# EAGLE board power-transistors (EAGLE 4.16)
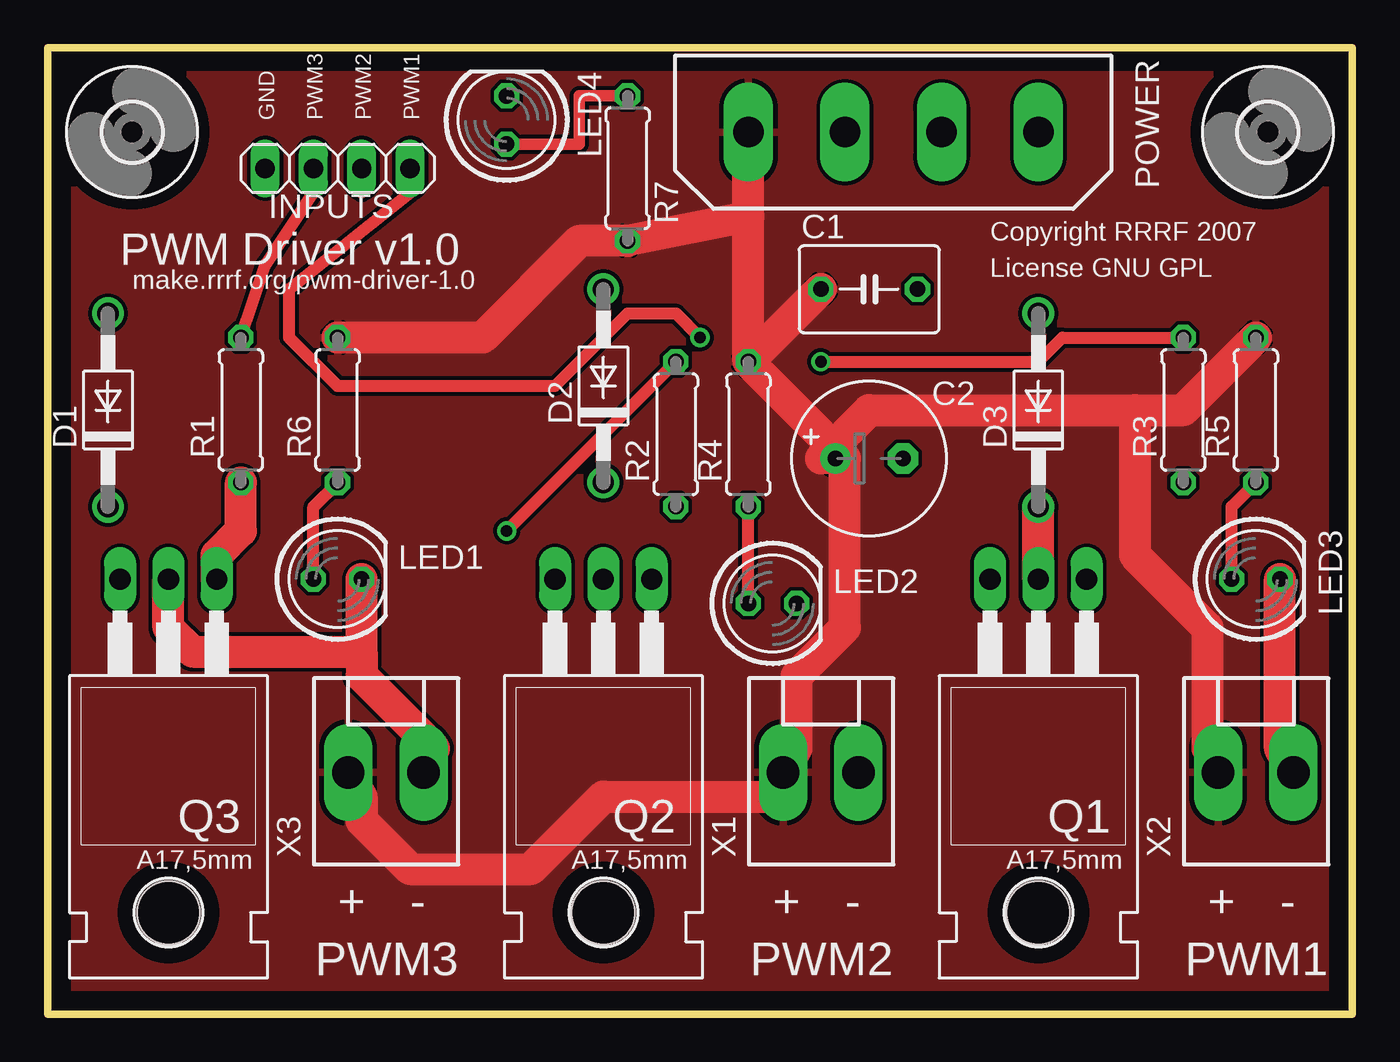
[diagram p0: board, top side]
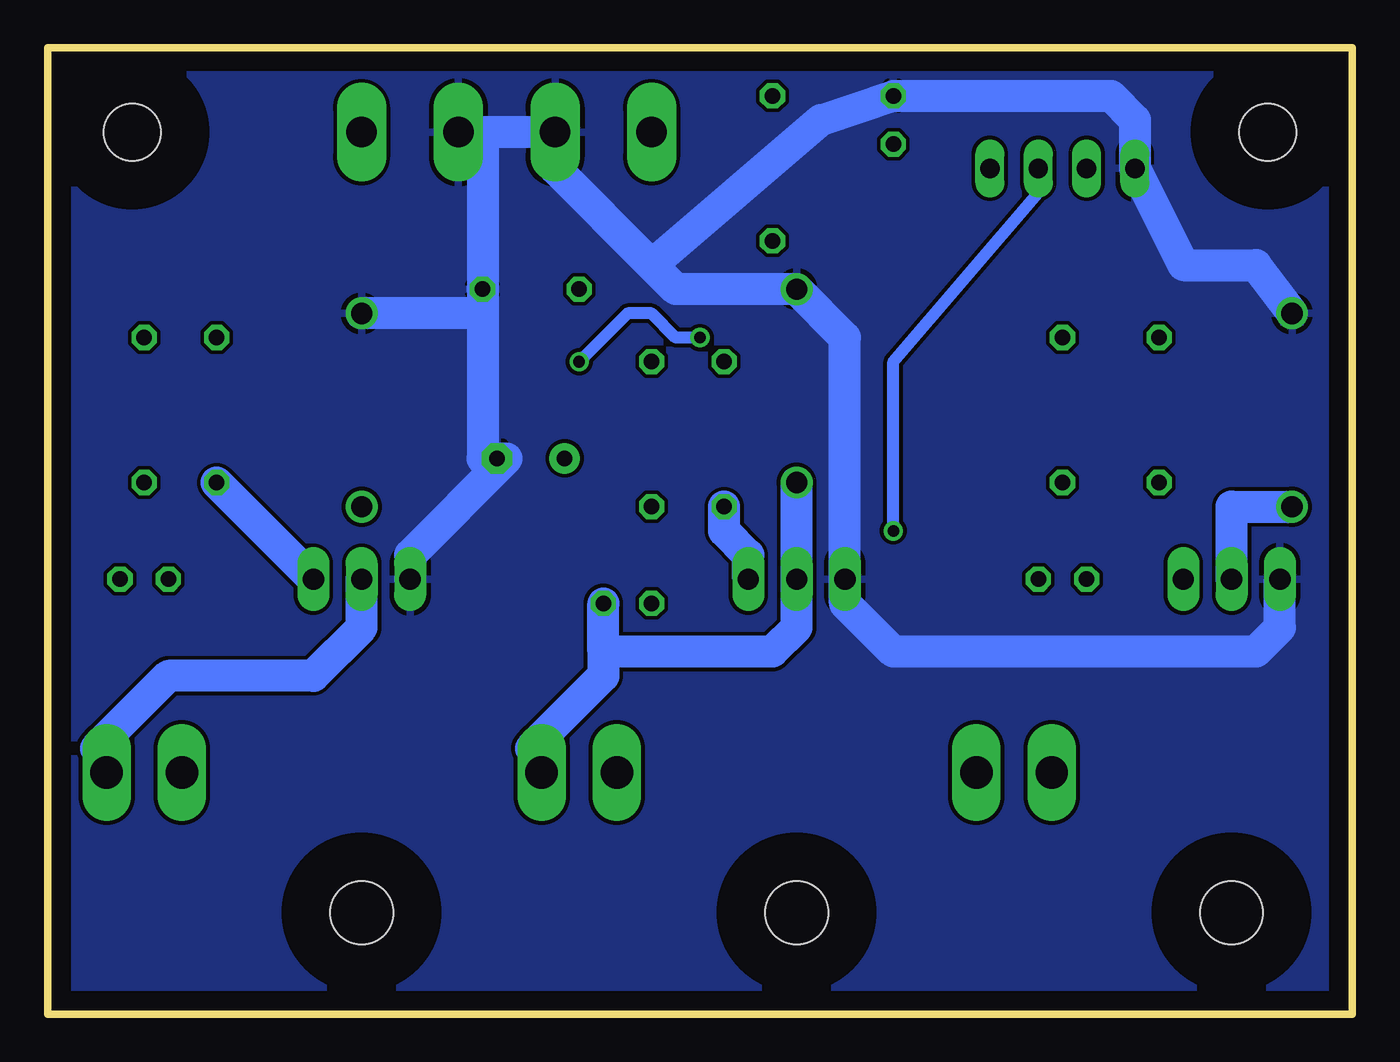
[diagram p1: board, bottom side, seen from below]

Size 68.58 x 50.8 mm. Coordinates in mm from the lower left corner, seen from the top.
Outline: 68.58,0 68.58,50.8 0,50.8 0,0 68.58,0
Copper layers (1*16): Top 0.035mm / dielectric 1.5mm / Bottom 0.035mm
Design rules "default": minimum track width 10mil, minimum drill 24mil, track to track 8mil, track to pad 8mil, pad to pad 8mil, via to via 8mil, smd to smd 8mil, copper to edge 40mil, drill to drill 8mil, minimum pad ring 10mil, minimum via ring 8mil, stop-mask expansion 4mil, vias tented up to drill 0mil, thermal gap 10mil
Net classes: 0 default: width 1.676 mm, drill 0.508 mm; 1 signal: width 0.635 mm, drill 0.381 mm

## Footprints (pad centres in the part's own frame; a part is rotated, then mirrored left to right if it is on the bottom)
C050-045X075 = drill 0.813 octagon: 1 -2.54,0; 2 2.54,0
E3,5-8 = drill 0.813 pad 1.6 round: + -1.778,0 | drill 0.813 pad 1.6 octagon: - 1.778,0
DO41-10 = drill 1.118 round: A 5.08,0; C -5.08,0
3,0 = hole 3: 0,0
1X04 = drill 1.016 long: 1 -3.81,0; 2 -1.27,0; 3 1.27,0; 4 3.81,0
LED5MM = drill 0.813 octagon: A -1.27,0; K 1.27,0
9090-4V = drill 1.6 pad 2.6 long: 1 -7.62,0; 2 -2.54,0; 3 2.54,0; 4 7.62,0
TO220AH = drill 1.118 long: B -2.54,-6.35; C 0,-6.35; E 2.54,-6.35 | hole 3.302: 0,11.176
0207/7 = drill 0.813 octagon: 1 -3.81,0; 2 3.81,0
KK-156-2 = drill 1.7 pad 2.184 long: 1 -1.98,0; 2 1.98,0

## Placement (x,y rotation side)
C1  100nF  [C050-045X075]  43.18,38.1 0 top
C2  100uF  [E3,5-8]  43.18,29.21 0 top
D1  1N4004  [DO41-10]  3.17,31.75 90 top
D2  1N4004  [DO41-10]  29.21,33.02 90 top
D3  1N4004  [DO41-10]  52.07,31.75 90 top
H1  MOUNT-HOLE3.0  [3,0]  64.14,46.36 0 top
H2  MOUNT-HOLE3.0  [3,0]  4.44,46.36 0 top
INPUTS  [1X04]  15.24,44.45 0 top
LED1  [LED5MM]  15.24,22.86 0 top
LED2  [LED5MM]  38.1,21.59 0 top
LED3  [LED5MM]  63.5,22.86 0 top
LED4  [LED5MM]  24.13,46.99 90 top
POWER  9090-4V  [9090-4V]  44.45,46.36 180 top
Q1  TIP120  [TO220AH]  52.07,16.51 180 top
Q2  TIP120  [TO220AH]  29.21,16.51 180 top
Q3  TIP120  [TO220AH]  6.35,16.51 180 top
R1  1K  [0207/7]  10.16,31.75 90 top
R2  1K  [0207/7]  33.02,30.48 90 top
R3  1K  [0207/7]  59.69,31.75 90 top
R4  560  [0207/7]  36.83,30.48 90 top
R5  560  [0207/7]  63.5,31.75 90 top
R6  560  [0207/7]  15.24,31.75 90 top
R7  560  [0207/7]  30.48,44.45 270 top
X1  [KK-156-2]  40.64,12.7 0 top
X2  [KK-156-2]  63.5,12.7 0 top
X3  [KK-156-2]  17.78,12.7 0 top

## Library data of the parts
C1 C2 R1-R7 = rcl
D1-D3 = diode
H1 H2 = holes
INPUTS = pinhead
LED1-LED4 = led
POWER = con-thomas-betts
Q1-Q3 = transistor-power
X1-X3 = con-molex

## Nets
GND: C1.2 C2.- D1.A D2.A D3.A INPUTS.1 LED4.K POWER.2 POWER.3 Q1.E Q2.E Q3.E
N$1: D1.C LED1.K Q3.C X3.2
N$2: D2.C LED2.K Q2.C X1.2
N$3: D3.C LED3.K Q1.C X2.2
N$4 [signal]: LED3.A R5.1
N$5 [signal]: LED2.A R4.1
N$6: Q2.B R2.1
N$7: Q1.B R3.1
N$8: Q3.B R1.1
N$9 [signal]: LED1.A R6.1
N$10 [signal]: LED4.A R7.1
PWM_1 [signal]: INPUTS.2 R1.2
PWM_2 [signal]: INPUTS.3 R2.2
PWM_3 [signal]: INPUTS.4 R3.2
VSS: C1.1 C2.+ POWER.4 R4.2 R5.2 R6.2 R7.2 X1.1 X2.1 X3.1

## Tracks (layer width: path | path; a pad name or v marks a point on that pad's centre or on a via)
GND
  Bottom 1.676: D1.A 5.08,39.37 8.89,39.37 INPUTS.1 11.43,46.99 12.7,48.26 LED4.K 27.94,46.99 36.83,39.37 | Q3.E 3.81,20.32 5.08,19.05 24.13,19.05 26.67,21.59 Q2.E 26.67,35.56 D2.A 35.56,38.1 36.83,39.37 | 36.83,39.37 41.91,44.45 POWER.3 POWER.2 45.72,45.72 C1.2 45.72,36.83 | 45.72,36.83 45.72,29.21 C2.- 44.45,29.21 49.53,24.13 Q1.E | 45.72,36.83 D3.A
  pour Bottom: 0.63,50.17 67.95,50.17 67.95,0.63 0.63,0.63
N$1
  Top 1.676: 16.51,19.05 16.51,17.78 20.32,13.97 X3.2 | 16.51,19.05 LED1.K | 16.51,19.05 7.62,19.05 6.35,20.32 Q3.C
  Bottom 1.676: D1.C 6.35,26.67 Q3.C
N$2
  Bottom 1.676: D2.C Q2.C 29.21,20.32 30.48,19.05 39.37,19.05 | 39.37,19.05 39.37,17.78 43.18,13.97 X1.2 | 39.37,19.05 LED2.K
N$3
  Top 1.676: Q1.C D3.C | LED3.K 64.77,13.97 X2.2
  Bottom 1.676: Q1.C 52.07,20.32 54.61,17.78 62.23,17.78 66.04,13.97 X2.2
N$4
  Top 0.635: LED3.A 62.23,26.67 R5.1
N$5
  Top 0.635: LED2.A R4.1
N$6
  Bottom 1.676: R2.1 33.02,25.4 31.75,24.13 Q2.B
N$7
  Bottom 1.676: Q1.B R3.1
N$8
  Top 1.676: R1.1 10.16,25.4 8.89,24.13 Q3.B
N$9
  Top 0.635: LED1.A 13.97,26.67 R6.1
N$10
  Top 0.61: LED4.A 27.94,45.72 27.94,48.26 R7.1
PWM_1
  Top 0.635: R1.2 11.43,39.37 13.97,43.18 INPUTS.2
PWM_2  (via drill 0.61)
  Top 0.635: INPUTS.3 16.51,43.18 | v24.13,25.4 R2.2
  Bottom 0.635: v24.13,25.4 24.13,34.29 16.51,43.18 INPUTS.3
PWM_3  (via drill 0.61)
  Top 0.635: v34.29,35.56 33.02,36.83 30.48,36.83 26.67,33.02 15.24,33.02 12.7,35.56 12.7,38.1 19.05,43.18 INPUTS.4 | R3.2 53.34,35.56 52.07,34.29 v40.64,34.29
  Bottom 0.635: v40.64,34.29 38.1,36.83 36.83,36.83 35.56,35.56 v34.29,35.56
VSS
  Top 1.676: X3.1 16.51,11.43 16.51,10.16 19.05,7.62 25.4,7.62 29.21,11.43 38.1,11.43 X1.1 39.37,13.97 39.37,17.78 41.91,20.32 41.91,29.21 | R6.2 22.86,35.56 27.94,40.64 R7.2 36.83,41.91 | R4.2 C1.1 | R5.2 59.69,31.75 57.15,31.75 | 57.15,31.75 43.18,31.75 40.64,29.21 C2.+ 41.91,29.21 | 57.15,31.75 57.15,24.13 60.96,20.32 60.96,13.97 X2.1 | 41.91,29.21 R4.2 | R4.2 36.83,41.91 | 36.83,41.91 POWER.4
  pour Top: 0.63,50.17 67.95,50.17 67.95,0.63 0.63,0.63

## Text on the board
tPlace: GND | PWM3 | PWM2 | PWM1 | Copyright RRRF 2007 | PWM Driver v1.0 | License GNU GPL | make.rrrf.org/pwm-driver-1.0 | + | - | + | - | + | - | PWM3 | PWM2 | PWM1